# Altium PCB 海关全向控制器开关转接板V4.PcbDoc
Units mm, origin at the board's own origin, x right, y up, seen from the top; angles counter-clockwise.
Board outline 20 x 10 mm, 2 copper layers (Top Layer, Bottom Layer), stack 1.071 mm thick; 1 components, 4 nets, 12 pads, 0 vias.
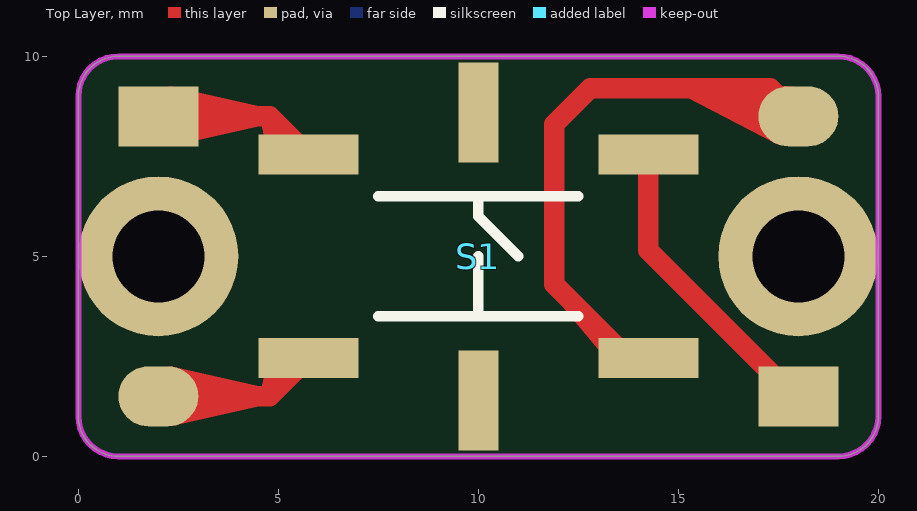
[diagram p0: Top Layer view]
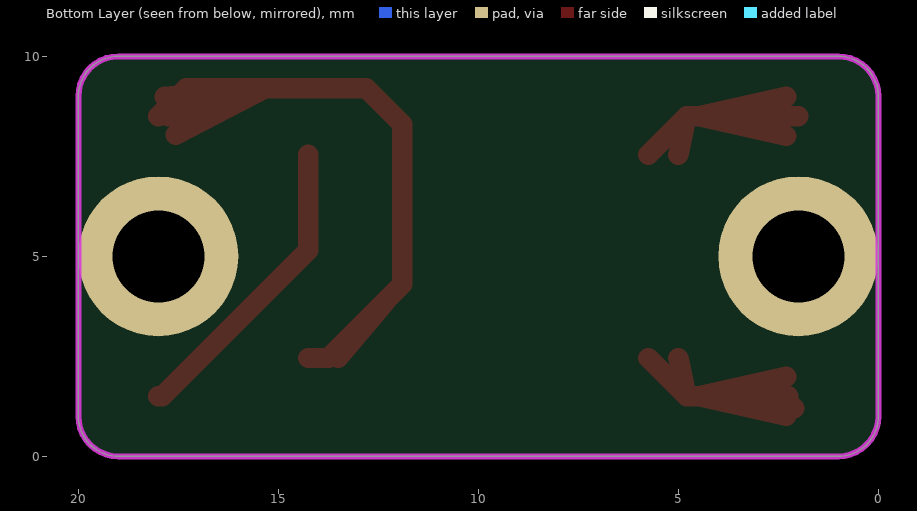
[diagram p1: Bottom Layer view, seen from below]

## Layer stack, top to bottom
Top Solder: solder mask 0.0102, Solder Resist, Dk 3.5
Top Layer: signal copper 0.0356
Dielectric 1: dielectric 1, FR-4, Dk 4.8
Bottom Layer: signal copper 0.0356
Bottom Solder: solder mask 0.0102, Solder Resist, Dk 3.5

## Board outline
0,1 ccw(c1,1) 1,0 19,0 ccw(c19,1) 20,1 20,9 ccw(c19,9) 19,10 1,10 ccw(c1,9) 0,9

## Design rules (kind name [scope] priority, off if disabled: settings)
Clearance [All] p1: gap=0.254
PolygonConnect [All] p1: connectstyle=Relief reliefconductorwidth=0.254 reliefentries=4 polygonreliefangle="90 Angle" airgapwidth=0.254
RoutingVias [All] p1: holewidth=0.711 width=1.27 viastyle="Through Hole" minholewidth=0.711 minwidth=1.27 maxholewidth=0.711 maxwidth=1.27
SolderMaskExpansion [All] p1: expansion=0.102
Width [All] p1: maxlimit=2.54 minlimit=0.254 preferedwidth=0.254
29 further rules are at their usual default settings.

## Components (designator, comment, footprint, x,y, rotation, side; value= is the part's Value field where it differs from the comment)
S1 "Jack 2x3" SW_6x6_SMD 10,5 r0 top locked

## Footprints (in the part's own frame and the unit in brackets; to place one, negate y for a bottom-side part, rotate by r counter-clockwise, add the part's x,y. Pads: shape width x height; smd on the part's side, far side on the other; paste and mask are expansions set on the pad)
SW_6x6_SMD [mm]
  rect 2.5x1 smd: 1(-4.25,-2.54) 2(-4.25,2.54) 3(4.25,-2.54) 4(4.25,2.54)
  rect 1x2.5 smd: 5(0,-3.6) 6(0,3.6)
  silkscreen extent -2.5,-1.5 2.5,1.5, body extent -5,-5 5,5, height 8.34

## Part data
S1: "双排座"

## Free pads (board coordinates)
  round 4 hole 2.3: ""(2,5) ""(18,5)
  oval 2x1.5 smd: ""(2,1.5) ""(18,8.5)
  rect 2x1.5 smd: ""(2,8.5) ""(18,1.5)

## Nets (pads, with @x,y where several pads share a name; then routed paths per layer and width w, separated by ;. In a path a pad name is that pad's centre, name@x,y a point inside that pad or via, vN(x,y) a via of type N, cw(c..) or ccw(c..) an arc to the next point about the centre after c; other vN are vias at no path point)
1: pad.@2,1.5 S1.1 | length 12
  Top Layer w0.508: pad.@2.1,1.2 2.4,1.5 4.79,1.5 ; pad.@2.25,1.5 4.524,1.5 ; pad.@2.304,1.007 4.524,1.5 ; pad.@2.304,1.993 4.524,1.5 ; S1.1@5,2.46 4.79,1.5 ; S1.1 4.79,1.5
2: pad.@2,8.5 S1.2 | length 12
  Top Layer w0.508: pad.@2,8.5 4.79,8.5 ; pad.@2.25,8.5 4.524,8.5 ; pad.@2.304,8.007 4.524,8.5 ; pad.@2.304,8.993 4.524,8.5 ; S1.2@5,7.54 4.79,8.5 ; S1.2 4.79,8.5
3: pad.@18,8.5 S1.3 | length 23.3
  Top Layer w0.508: 12.297,3.903 S1.3@13.5,2.46 ; S1.3 13.74,2.46 11.9,4.3 11.9,8.3 12.8,9.2 17.3,9.2 pad.@18,8.5 ; pad.@17.566,8.039 15.327,9.2 ; pad.@17.75,8.5 15.327,9.2 ; pad.@17.84,8.988 15.327,9.2
4: pad.@18,1.5 S1.4 | length 7.7
  Top Layer w0.508: S1.4 14.25,5.15 17.9,1.5 pad.@18,1.5
pads on no net: S1.5 S1.6

## Keep-outs
Keep-Out Layer:
  the board outline again, w0.152